# Altium PCB Red.PcbDoc (part 2 of 3)
Units mm, origin at the board's own origin, x right, y up, seen from the top; angles counter-clockwise.
Board outline 152.4 x 101.6 mm, 4 copper layers (Top Layer, VCC, GND, Bottom Layer); 97 components, 56 nets, 284 pads, 185 vias.
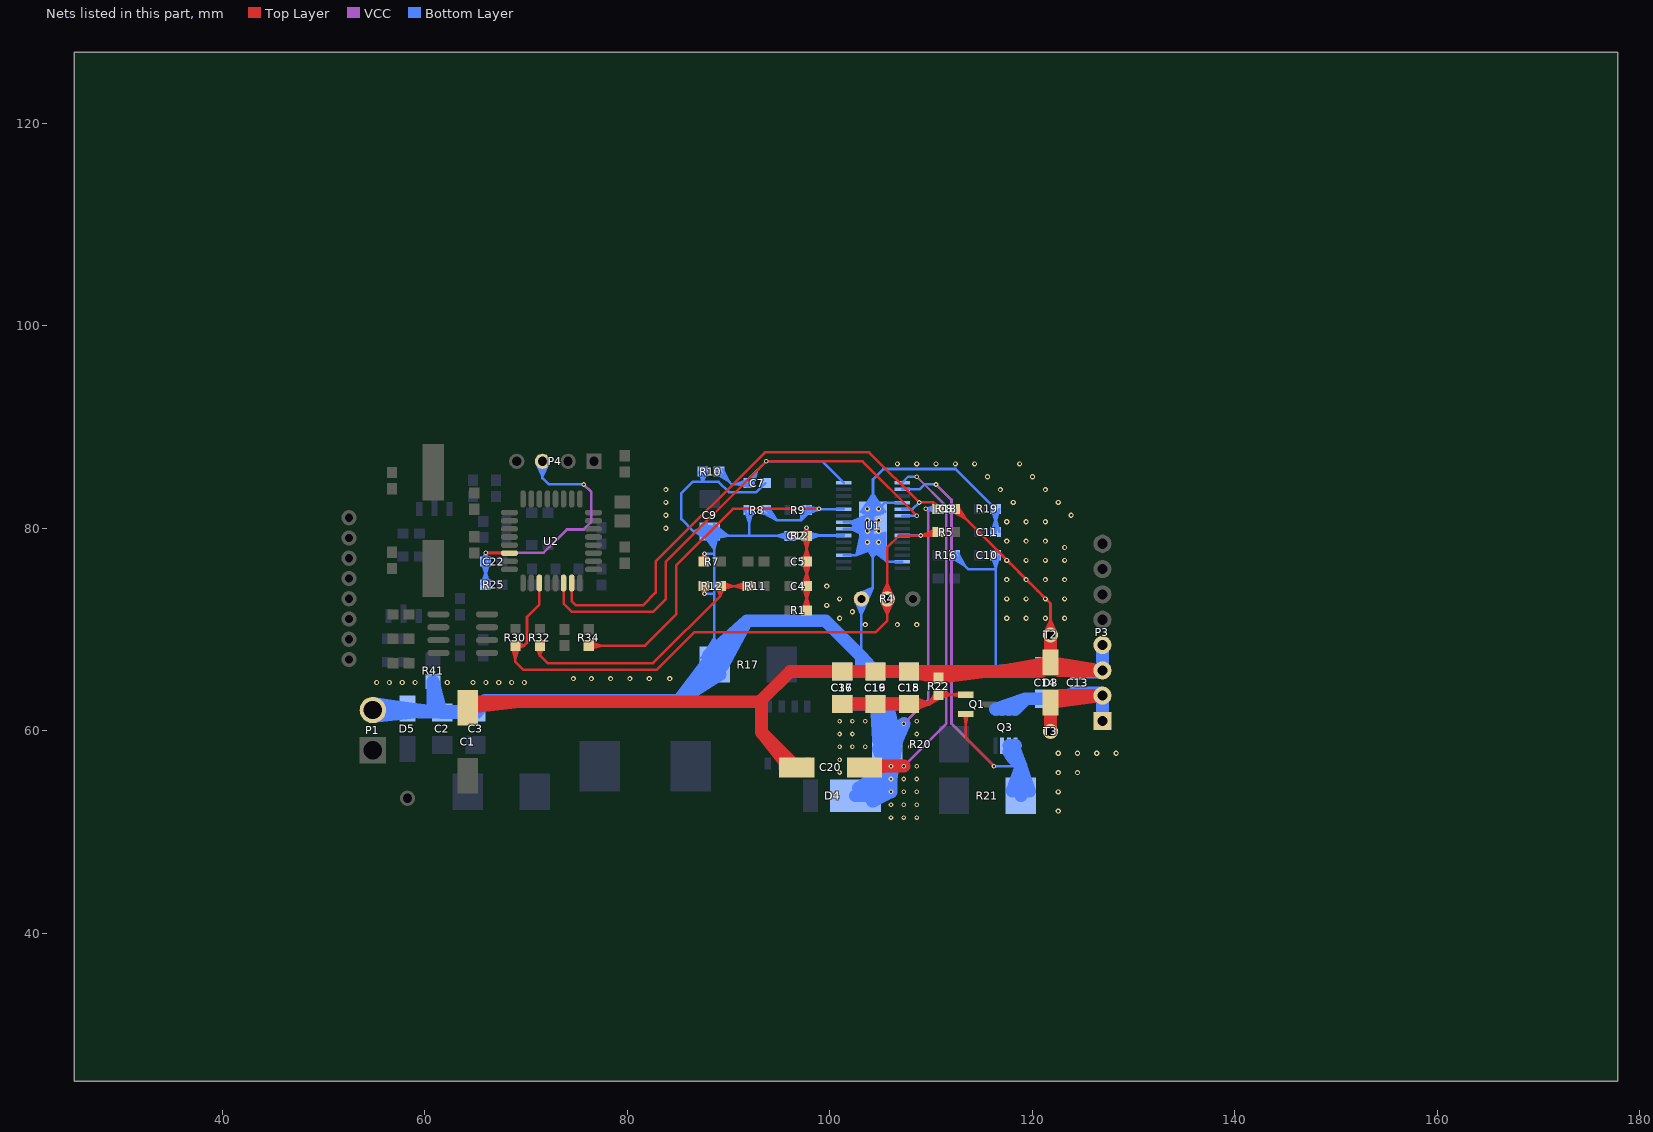
[diagram p4: the nets of this part, all layers, seen from the top]

## Via types
v1: diameter 0.457, hole 0.229, Top Layer to Bottom Layer, tented both sides, 92 vias
v2: diameter 0.508, hole 0.254, Top Layer to Bottom Layer, tented both sides, 85 vias
v3: diameter 0.508, hole 0.254, Top Layer to Bottom Layer, 8 vias

## Nets (pads, with @x,y where several pads share a name; then routed paths per layer and width w, separated by ;. In a path a pad name is that pad's centre, name@x,y a point inside that pad or via, vN(x,y) a via of type N, cw(c..) or ccw(c..) an arc to the next point about the centre after c; other vN are vias at no path point) (continued)
CSOUT: C7.2 R10.2 U1.6 U1.28 U2.14 | length 82.7
  Top Layer w0.254: U2.14@73.717,74.59 73.717,72.587 74.549,71.755 82.55,71.755 83.82,73.025 83.82,76.708 v1(93.726,86.614) ; 92.959,85.847 v1(93.726,86.614) ; 107.838,82.027 v1(108.585,81.239) 108.585,81.28 103.251,86.614 v1(93.726,86.614)
  Bottom Layer w0.254: R10.2@88.881,85.308 90.104,84.559 ; R10.2@89.065,85.598 90.318,84.345 92.037,84.345 92.037,84.925 v1(93.726,86.614) 99.267,86.614 U1.28@101.392,84.489 100.678,85.203 ; R10.2@89.115,85.598 90.104,84.559 ; R10.2@89.416,85.818 90.104,84.559 ; C7.2@91.793,84.684 92.853,85.741 ; C7.2@91.9,84.818 90.72,84.345 ; C7.2@91.965,84.083 90.72,84.345 ; C7.2@91.987,84.455 90.72,84.345 ; C7.2@92.087,84.455 92.853,85.741 ; C7.2@92.429,84.306 92.853,85.741 ; U1.6@107.142,81.239 v1(108.585,81.239) ; U1.6@107.594,81.239 v1(108.585,81.239) ; v1(108.585,81.239) 107.742,81.239 v1(108.585,81.239)
CTRL: R4.2 R5.2 R30.2 U1.9 U2.11 | length 95
  Top Layer w0.254: R30.2@68.592,68.31 68.961,67.103 ; R30.2@68.961,68.365 68.961,67.103 ; R30.2@69.043,68.051 69.812,68.415 ; R30.2@69.043,68.779 69.812,68.415 ; R30.2@69.33,68.31 68.961,67.103 ; U2.11@71.317,74.59 71.317,72.46 70.104,71.247 70.104,68.707 69.812,68.415 ; R4.2@105.043,72.893 105.664,71.501 ; R4.2@105.043,73.157 105.664,74.549 ; R4.2@105.286,72.977 105.664,71.501 ; R4.2@105.286,73.073 105.664,74.549 ; R4.2@106.042,72.977 105.664,71.501 ; R4.2@106.042,73.073 105.664,74.549 ; R4.2@106.285,72.893 105.664,71.501 ; R4.2@106.285,73.157 105.664,74.549 ; 107.972,79.248 v1(108.966,79.289) ; 109.959,79.248 v1(108.966,79.289) ; 109.961,79.669 v1(108.966,79.289) ; 109.996,79.457 v1(108.966,79.289) ; R5.2@110.518,79.976 109.195,79.248 ; R5.2@110.656,79.629 109.195,79.248 ; R5.2@110.706,79.629 110.325,79.248 106.807,79.248 105.664,78.105 R4.2@105.664,73.025 105.664,70.866 104.521,69.723 86.614,69.723 82.931,66.04 69.723,66.04 68.961,66.802 R30.2@68.961,68.415 69.812,68.415 ; v1(108.966,79.289) 109.195,79.248 ; v1(108.966,79.289) 109.195,79.248 ; v1(108.966,79.289) 109.195,79.248 ; v1(108.966,79.289) 110.705,79.259 109.195,79.248
  Bottom Layer w0.254: U1.9@107.142,79.289 v1(108.966,79.289) ; U1.9@107.742,79.289 108.679,79.289 v1(108.966,79.289) ; v1(108.966,79.289) 107.975,79.289 v1(108.966,79.289)
EN/UVLO: R8.1 R9.1 R34.2 U1.24 | length 60.2
  Top Layer w0.254: R34.2@76.2,68.415 81.75,68.415 84.836,71.501 84.836,76.327 90.424,81.915 v1(98.933,81.915) ; R34.2@76.255,68.046 77.462,68.415 R34.2@76.255,68.784
  Bottom Layer w0.254: R8.1@93.47,81.485 94.76,80.792 ; R8.1@93.637,81.915 94.78,80.772 97.155,80.772 ; R8.1@93.687,81.788 94.76,80.792 ; R8.1@93.974,82.027 94.76,80.792 ; R9.1@97.293,81.894 97.155,80.772 ; R9.1@97.651,81.788 97.155,80.772 ; R9.1@97.701,81.915 R9.1@97.701,81.788 97.701,81.318 97.155,80.772 ; R9.1@97.727,81.889 U1.24@101.392,81.889 ; R9.1@97.751,81.788 v1@99.02,81.889 ; R9.1@97.776,82.16 v1@99.02,81.889 ; R9.1@97.835,81.425 v1@99.02,81.889 ; R9.1@97.941,81.889 v1(98.933,81.915) ; R9.1@97.946,81.804 v1(98.933,81.915) ; R9.1@97.955,81.571 97.155,80.772 ; R9.1@97.959,82.12 v1(98.933,81.915) ; R9.1@98.008,81.493 v1(98.933,81.915) ; 99.855,81.889 U1.24@100.792,81.889 ; 99.925,81.889 v1(98.933,81.915)
F\A\U\L\T\: R11.1 R12.2 R32.2 | length 37.7
  Top Layer w0.254: R32.2@71.009,68.29 71.374,67.437 ; R32.2@71.374,68.288 71.374,67.437 ; R32.2@71.374,68.365 71.374,67.437 ; R32.2@71.739,68.29 71.374,67.437 ; R12.2@88.826,74.224 89.192,73.317 ; R12.2@89.242,74.295 90.504,74.295 ; R12.2@89.297,73.926 90.504,74.295 ; R12.2@89.297,74.664 90.504,74.295 ; R12.2@89.558,74.224 89.192,73.317 ; R11.1@91.805,73.926 90.598,74.295 ; R11.1@91.805,74.664 90.598,74.295 ; R11.1@91.86,74.295 90.598,74.295 ; R11.1@91.91,74.295 R12.2@89.192,74.295 89.192,73.317 ; 71.374,67.437 72.136,66.675 82.55,66.675 89.192,73.317
GND: C1.2 C2.1 C3.1 C7.1 C8.1 C9.1 C10.2 C11.2 C12.2 C13.1 C14.1 C15.1 C16.1 C17.1 C18.1 C19.1 C20.2 C36.1 D3.1 D5.1 P1.2 P3.3 P3.4 R4.1 R7.1 R8.2 R10.1 R12.1 R16.2 R17.1 R19.2 R22.1 R41.2 T2.1 U1.4 U1.13 U1.17 U1.21 U1.22 U1.29 | length 936
  Top Layer w0.254: C8.1@112.14,81.611 113.415,80.933 ; C8.1@112.306,82.042 121.793,72.555 ; C8.1@112.356,81.915 113.415,80.933 ; C8.1@112.643,82.153 113.415,80.933 ; 116.701,77.647 v2(117.475,76.835) 118.286,76.062 ; 118.606,75.742 v2(119.38,74.93) 120.19,74.158 ; 120.511,73.837 v2(121.285,73.025) 121.793,72.555 ; T2.1@121.183,69.597 121.793,70.981 ; T2.1@121.427,69.514 121.793,70.981 ; T2.1@121.793,69.469 121.793,72.555 ; T2.1@122.159,69.514 121.793,70.981 ; T2.1@122.403,69.597 121.793,70.981 ; v1@87.592,73.571 R12.1@87.592,74.295 ; v1@87.592,73.571 87.232,74.199 v1(87.63,73.533) ; v1@87.592,73.571 87.952,74.199 v1(87.63,73.533) ; v1@87.592,73.571 R12.1@87.592,74.295 ; R12.1@87.592,74.295 v1(87.63,73.533) ; R12.1@87.592,74.295 v1(87.63,73.533) ; v1@87.592,77.432 87.952,76.804 v1(87.63,77.47) ; v1@87.592,77.432 87.232,76.804 v1(87.63,77.47) ; v1@87.592,77.432 R7.1@87.592,76.708 v1(87.63,77.47) ; v1@87.592,77.432 v1(87.63,77.47)
  Top Layer w1.27: 69.36,62.865 C1.2@64.262,62.278 64.849,62.865 93.266,62.865 ; C20.2@95.976,56.388 93.266,59.848 ; 96.409,65.862 C36.1@101.119,65.862 ; C20.2@96.726,56.388 93.266,59.848 ; 115.366,65.862 R22.1@110.744,65.239 ; 116.827,65.862 D3.1@121.793,66.77 ; D3.1@121.793,67.27 T2.1@121.793,69.469 D3.1@121.793,66.77 ; P3.3@126.632,65.973 D3.1@121.793,66.77 ; P3.3@126.921,65.973 122.59,65.973 D3.1@121.793,66.27 ; 93.266,59.848 93.266,63.04 96.088,65.862 C36.1@101.219,65.862 ; C36.1@101.219,65.862 104.421,65.862 101.319,65.862 C19.1@104.521,65.862 ; C36.1@101.219,65.862 C19.1@104.521,65.862 ; C19.1@104.521,65.862 107.723,65.862 104.621,65.862 C18.1@107.823,65.862 ; C19.1@104.521,65.862 C18.1@107.823,65.862 ; C18.1@107.823,65.862 R22.1@110.744,65.239 ; C18.1@107.823,65.862 120.885,65.862 ; R22.1@110.744,65.239 107.923,65.862 112.633,65.862 R22.1@110.744,65.239 ; 120.885,65.862 D3.1@121.793,66.27 ; 120.885,65.862 D3.1@121.793,66.27 ; 120.885,65.862 D3.1@121.793,66.77
  Bottom Layer w0.254: R10.1@87.099,85.527 87.465,84.62 ; R17.1@87.326,67.219 88.57,69.113 ; R10.1@87.465,85.598 87.465,84.62 ; C9.1@87.529,79.371 88.57,77.953 ; R17.1@87.555,67.087 88.57,69.113 ; v1(87.63,73.533) 88.57,73.533 ; v1(87.63,77.47) 88.57,77.47 ; C9.1@87.748,79.508 88.57,77.953 ; R17.1@87.794,66.984 88.57,69.113 ; R10.1@87.831,85.527 87.465,84.62 ; C9.1@87.835,78.934 86.563,79.68 ; C9.1@87.835,80.426 86.563,79.68 ; C9.1@87.947,79.169 86.563,79.68 ; C9.1@87.947,80.191 86.563,79.68 ; C9.1@87.982,79.611 88.57,77.953 ; C9.1@88.014,79.416 86.563,79.68 ; C9.1@88.014,79.944 86.563,79.68 ; C9.1@88.038,79.68 86.563,79.68 ; R17.1@88.04,66.909 88.57,69.113 ; C9.1@88.138,79.68 86.563,79.68 ; C9.1@88.188,79.163 90.014,79.248 ; C9.1@88.194,79.419 90.014,79.248 ; C9.1@88.218,78.907 90.014,79.248 ; R17.1@88.291,66.864 88.57,69.113 ; C9.1@88.319,79.932 90.014,79.248 ; C9.1@88.431,80.162 90.014,79.248 ; C9.1@88.501,79.71 88.57,77.953 ; R17.1@88.57,67.771 88.57,73.533 ; C9.1@88.575,80.375 90.014,79.248 ; R17.1@88.648,66.848 88.57,69.113 ; C9.1@88.757,79.702 88.57,77.953 ; R17.1@89.003,66.888 88.57,69.113 ; C9.1@89.011,79.656 88.57,77.953 ; R17.1@89.25,66.951 88.57,69.113 ; R17.1@89.491,67.042 88.57,69.113 ; R17.1@89.722,67.161 88.57,69.113 ; R17.1@89.941,67.309 88.57,69.113 ; R8.2@91.668,81.733 92.037,80.526 R8.2@92.406,81.733 ; 92.037,79.413 R8.2@92.037,81.788 ; C7.1@93.637,84.455 92.748,83.566 90.043,83.566 89.027,84.582 86.449,84.582 85.344,83.477 85.344,80.899 86.563,79.68 ; C12.2@95.996,78.879 94.789,79.248 ; C12.2@95.996,79.617 94.789,79.248 ; C12.2@96.051,79.248 94.789,79.248 ; C12.2@96.101,79.248 88.57,79.248 88.57,77.47 ; U1.17@101.392,77.339 102.612,77.339 ; U1.21@101.392,79.939 103.942,79.939 U1.29@104.267,80.264 ; U1.22@101.392,80.589 U1.29@103.942,80.589 ; U1.17@101.992,77.339 102.612,77.339 ; U1.21@101.992,79.939 U1.29@102.929,79.939 ; U1.22@101.992,80.589 U1.29@102.929,80.589 ; 102.242,79.875 v3(103.717,79.714) ; 102.242,80.653 v3(103.717,80.814) ; 102.296,79.883 v3(103.717,79.714) ; 102.296,80.645 v3(103.717,80.814) ; R4.1@102.503,72.893 103.124,71.501 ; 102.657,79.824 v3(103.717,79.714) ; 102.657,80.704 v3(103.717,80.814) ; 102.661,79.939 v3(103.717,79.714) ; 102.661,80.589 v3(103.717,80.814) ; 102.67,79.833 v3(103.717,79.714) ; 102.67,80.695 v3(103.717,80.814) ; 102.68,80.16 v3(103.717,79.714) ; 102.68,80.368 v3(103.717,80.814) ; 102.697,80.186 v3(103.717,79.714) ; 102.697,80.342 v3(103.717,80.814) ; 102.705,79.893 v3(103.717,79.714) ; 102.705,79.897 v3(103.717,79.714) ; 102.705,80.631 v3(103.717,80.814) ; 102.705,80.635 v3(103.717,80.814) ; R4.1@102.746,72.977 103.124,71.501 ; R4.1@102.776,73.556 104.226,74.127 ; 102.786,80.221 v3(103.717,80.814) ; 102.786,80.307 v3(103.717,79.714) ; 102.79,80.203 v3(103.717,79.714) ; 102.79,80.325 v3(103.717,80.814) ; 102.793,80.201 v3(103.717,80.814) ; 102.793,80.327 v3(103.717,79.714) ; 102.798,80.227 v3(103.717,79.714) ; 102.798,80.301 v3(103.717,80.814) ; 102.863,77.775 v3(103.717,78.614) ; R4.1@102.89,73.325 104.226,74.127 ; 102.94,77.797 v3(103.717,78.614) ; 102.997,77.785 v3(103.717,78.614) ; 102.999,77.645 v3(103.717,78.614) ; 103.012,77.739 v3(103.717,78.614) ; 103.017,77.732 v3(103.717,78.614) ; U1.29@103.085,78.773 v3(103.717,79.714) ; 103.124,65.862 103.124,66.04 ; 103.124,67.31 R4.1@103.124,73.025 104.226,74.127 ; U1.29@103.155,79.815 102.612,77.339 ; U1.29@103.254,78.776 v3(103.717,79.714) ; R4.1@103.424,72.791 104.226,74.127 ; U1.29@103.479,78.661 105.457,76.874 ; R4.1@103.502,72.977 103.124,71.501 ; U1.29@103.621,78.138 v3(104.817,78.614) ; U1.29@103.647,79.653 102.612,77.339 ; R4.1@103.655,72.677 104.226,74.127 ; U1.29@103.661,78.843 105.457,76.874 ; U1.29@103.737,79.14 U1.22@102.121,80.589 ; U1.29@103.737,81.388 U1.21@102.121,79.939 ; R4.1@103.745,72.893 103.124,71.501 ; U1.29@103.756,79.131 U1.22@102.034,80.589 ; U1.29@103.756,81.397 U1.21@102.034,79.939 ; U1.29@103.853,78.132 v3(104.817,78.614) ; U1.29@103.916,77.996 v3(104.817,78.614) ; 104.028,77.537 v3(103.717,78.614) ; U1.29@104.04,81.281 104.267,83.401 ; 104.052,77.639 v3(103.717,78.614) ; 104.051,82.974 v3(103.717,81.914) ; 104.079,82.881 v3(103.717,81.914) ; 104.081,77.351 v3(103.717,78.614) ; U1.29@104.093,79.033 U1.21@102.121,79.939 ; U1.29@104.093,81.495 U1.22@102.121,80.589 ; U1.29@104.1,79.032 U1.21@102.034,79.939 ; U1.29@104.1,81.496 U1.22@102.034,80.589 ; 104.101,83.153 v3(103.717,81.914) ; 104.12,77.63 v3(103.717,78.614) ; 104.15,82.893 v3(103.717,81.914) ; 104.184,77.608 v3(103.717,78.614) ; U1.29@104.221,80.042 U1.22@102.121,80.589 ; U1.29@104.221,80.486 U1.21@102.121,79.939 ; U1.29@104.223,80.041 U1.22@102.034,80.589 ; U1.29@104.223,80.487 U1.21@102.034,79.939 ; U1.29@104.267,81.269 104.267,83.401 ; 104.355,77.641 v3(104.817,78.614) ; 104.384,82.893 v3(104.817,81.914) ; 104.415,77.395 v3(104.817,78.614) ; 104.428,77.654 v3(104.817,78.614) ; 104.433,83.153 v3(104.817,81.914) ; 104.455,82.881 v3(104.817,81.914) ; 104.46,77.568 v3(104.817,78.614) ; 104.472,77.764 v3(103.717,78.614) ; 104.474,77.602 v3(103.717,78.614) ; 104.483,82.974 v3(104.817,81.914) ; U1.29@104.493,79.243 104.226,77.126 ; U1.29@104.494,81.281 104.267,83.401 ; 104.561,77.856 v3(103.717,78.614) ; 104.719,77.858 v3(103.717,78.614) ; U1.29@104.748,78.703 102.612,77.339 ; U1.29@104.825,79.656 v3(104.817,78.614) ; U1.29@104.876,78.48 102.612,77.339 ; U1.29@104.981,78.241 102.612,77.339 ; U1.29@104.982,78.511 v3(104.817,79.714) ; 105.136,77.516 v3(104.817,78.614) ; 105.156,77.634 v3(104.817,78.614) ; 105.169,77.346 v3(104.817,78.614) ; U1.29@105.219,79.529 105.457,76.874 ; 105.233,77.647 v3(104.817,78.614) ; 105.315,77.628 v3(104.817,78.614) ; U1.29@105.478,79.539 105.457,76.874 ; U1.29@105.605,82.539 U1.4@106.542,82.539 ; U1.13@106.542,76.689 105.642,76.689 ; U1.13@107.142,76.689 105.642,76.689 ; U1.4@107.142,82.539 105.442,82.539 v3(104.817,81.914) ; R16.2@112.122,77.053 113.345,76.304 ; R16.2@112.306,77.343 113.703,75.946 116.37,75.946 ; R16.2@112.356,77.343 113.345,76.304 ; R16.2@112.657,77.563 113.345,76.304 ; C10.2@116.001,77.288 116.37,76.081 C10.2@116.739,77.288 ; C11.2@116.001,79.684 116.37,80.891 C11.2@116.739,79.684 ; R19.2@116.001,81.86 116.37,80.653 R19.2@116.739,81.86 ; 116.37,65.946 116.37,75.946 ; C10.2@116.37,77.343 116.37,75.946 ; C11.2@116.37,79.629 R19.2@116.37,81.915 112.433,85.852 105.283,85.852 104.267,84.836 U1.29@104.267,80.264 ; 88.57,73.533 88.57,77.47 ; 88.57,77.953 88.238,79.68 90.014,79.248 ; U1.21@102.034,79.939 v3(103.717,79.714) ; U1.21@102.034,79.939 U1.29@104.267,80.264 ; U1.21@102.034,79.939 U1.29@104.288,80.038 ; U1.21@102.034,79.939 104.147,80.73 v3(103.717,80.814) ; U1.21@102.034,79.939 104.285,79.783 v3(103.717,79.714) ; U1.21@102.034,79.939 104.044,80.964 v3(103.717,80.814) ; U1.21@102.034,79.939 U1.29@104.253,79.529 ; U1.21@102.034,79.939 103.914,81.188 v3(103.717,80.814) ; U1.21@102.034,79.939 104.192,79.278 v3(103.717,79.714) ; U1.22@102.034,80.589 v3(103.717,80.814) ; U1.22@102.034,80.589 U1.29@104.267,80.264 ; U1.22@102.034,80.589 U1.29@104.288,80.49 ; U1.22@102.034,80.589 104.285,80.745 v3(103.717,80.814) ; U1.22@102.034,80.589 104.147,79.798 v3(103.717,79.714) ; U1.22@102.034,80.589 U1.29@104.253,80.999 ; U1.22@102.034,80.589 104.044,79.564 v3(103.717,79.714) ; U1.22@102.034,80.589 104.192,81.25 v3(103.717,80.814) ; U1.22@102.034,80.589 103.914,79.34 v3(103.717,79.714) ; U1.21@102.121,79.939 v3(103.717,79.714) ; U1.21@102.121,79.939 U1.29@104.267,80.264 ; U1.21@102.121,79.939 U1.29@104.289,80.038 ; U1.21@102.121,79.939 104.143,80.729 v3(103.717,80.814) ; U1.21@102.121,79.939 104.286,79.783 v3(103.717,79.714) ; U1.21@102.121,79.939 104.035,80.962 v3(103.717,80.814) ; U1.21@102.121,79.939 U1.29@104.252,79.529 ; U1.21@102.121,79.939 103.9,81.182 v3(103.717,80.814) ; U1.21@102.121,79.939 104.188,79.278 v3(103.717,79.714) ; U1.22@102.121,80.589 v3(103.717,80.814) ; U1.22@102.121,80.589 U1.29@104.267,80.264 ; U1.22@102.121,80.589 U1.29@104.289,80.49 ; U1.22@102.121,80.589 104.286,80.745 v3(103.717,80.814) ; U1.22@102.121,80.589 104.143,79.799 v3(103.717,79.714) ; U1.22@102.121,80.589 U1.29@104.252,80.999 ; U1.22@102.121,80.589 104.035,79.566 v3(103.717,79.714) ; U1.22@102.121,80.589 104.188,81.25 v3(103.717,80.814) ; U1.22@102.121,80.589 103.9,79.346 v3(103.717,79.714) ; 102.612,77.339 U1.29@104.267,79.259 ; 102.612,77.339 104.089,79.399 v3(103.717,78.614) ; 102.612,77.339 104.432,79.103 v3(103.717,78.614) ; 102.612,77.339 103.875,79.537 v3(103.717,78.614) ; 102.612,77.339 U1.29@104.6,78.912 ; 102.612,77.339 103.406,79.746 v3(103.717,79.714) ; 102.612,77.339 103.717,78.444 v3(103.717,78.614) ; v3(103.717,78.614) 103.352,78.628 v3(103.717,79.714) ; v3(103.717,78.614) v3(103.717,79.714) ; v3(103.717,78.614) U1.29@104.267,79.259 ; v3(103.717,78.614) U1.29@104.6,78.912 ; v3(103.717,78.614) 103.315,78.46 105.457,76.874 ; v3(103.717,78.614) 103.541,79.146 104.226,77.126 ; v3(103.717,78.614) 103.301,79.048 104.226,77.126 ; v3(103.717,78.614) 103.071,78.92 104.226,77.126 ; v3(103.717,78.614) 103.858,79.006 105.457,76.874 ; v3(103.717,78.614) 104.04,79.251 104.226,77.126 ; v3(103.717,78.614) 103.788,79.214 104.226,77.126 ; v3(103.717,79.714) U1.29@104.289,80.038 ; v3(103.717,79.714) U1.29@104.252,79.529 ; v3(103.717,79.714) U1.29@104.288,80.038 ; v3(103.717,79.714) U1.29@104.253,79.529 ; v3(103.717,79.714) U1.29@104.267,80.264 ; v3(103.717,80.814) U1.29@104.289,80.49 ; v3(103.717,80.814) U1.29@104.252,80.999 ; v3(103.717,80.814) U1.29@104.288,80.49 ; v3(103.717,80.814) U1.29@104.253,80.999 ; v3(103.717,81.914) 103.543,81.396 104.267,83.401 ; v3(103.717,81.914) 103.305,81.498 104.267,83.401 ; v3(103.717,81.914) 103.078,81.631 104.267,83.401 ; v3(103.717,81.914) 103.789,81.323 104.267,83.401 ; 104.226,74.127 104.226,78.105 105.642,76.689 ; 104.226,77.126 U1.29@104.267,79.259 ; 104.226,77.126 104.744,79.196 v3(104.817,78.614) ; 104.226,77.126 104.988,79.119 v3(104.817,78.614) ; 104.226,77.126 105.224,79.011 v3(104.817,78.614) ; 104.226,77.126 105.449,78.874 v3(104.817,78.614) ; U1.29@104.267,79.259 v3(104.817,78.614) ; U1.29@104.267,79.259 105.457,76.874 ; 104.267,83.401 104.745,81.323 v3(104.817,81.914) ; 104.267,83.401 104.991,81.396 v3(104.817,81.914) ; 104.267,83.401 105.229,81.498 v3(104.817,81.914) ; 104.267,83.401 105.456,81.631 v3(104.817,81.914) ; U1.29@104.6,78.912 v3(104.817,78.614) ; U1.29@104.715,79.434 v3(104.817,78.614) ; U1.29@104.715,79.434 v3(104.817,79.714) ; U1.29@104.715,79.434 105.457,76.874 ; v3(104.817,78.614) v3(104.817,79.714) ; v3(104.817,78.614) 105.122,78.651 v3(104.817,79.714) ; v3(104.817,78.614) 104.068,79.149 105.457,76.874 ; v3(104.817,78.614) 104.474,79.352 105.457,76.874 ; v3(104.817,78.614) 104.964,79.493 105.457,76.874
  Bottom Layer w1.27: R17.1@88.009,66.831 85.092,62.992 ; R17.1@88.017,67.44 91.821,70.866 ; C9.1@88.138,79.68 C9.1@88.57,79.248 ; R17.1@88.648,66.248 85.092,62.992 ; R17.1@88.648,66.848 91.821,70.866 ; R17.1@89.173,65.56 85.092,62.992 ; R17.1@89.37,66.371 91.821,70.866 ; C15.1@107.923,65.862 112.633,65.862 ; 116.286,65.862 C14.1@121.185,66.37 ; P3.4@126.921,68.473 P3.3@126.921,65.973 ; D5.1@58.293,62.198 54.906,61.387 59.993,61.924 ; D5.1@58.293,62.198 59.993,61.924 ; D5.1@58.293,62.198 54.939,62.713 59.993,61.924 ; D5.1@58.293,62.198 59.993,61.924 ; D5.1@58.293,62.198 56.906,61.924 C2.1@61.622,61.798 ; D5.1@58.293,62.198 C2.1@61.622,61.798 ; D5.1@58.293,62.198 P1.2@54.879,62.051 59.993,61.924 ; D5.1@58.293,62.198 59.993,61.924 ; D5.1@58.293,62.198 54.879,61.924 60.579,61.924 ; D5.1@58.293,62.198 60.579,61.924 ; 60.579,61.924 64.924,61.798 61.822,61.798 C3.1@64.898,61.924 ; 60.579,61.924 C2.1@61.622,61.798 ; 60.579,61.924 C2.1@61.622,61.798 ; 60.579,61.924 C2.1@61.622,61.798 ; 60.579,61.924 C3.1@64.898,61.924 ; 60.579,61.924 60.833,62.178 R41.2@60.833,64.863 C2.1@61.622,61.798 ; C3.1@64.898,61.924 65.966,62.992 ; 65.966,62.992 65.124,61.798 65.966,62.992 ; 65.966,62.992 85.092,62.992 ; 85.092,62.992 R17.1@88.648,66.548 88.648,67.693 91.821,70.866 ; 91.821,70.866 99.568,70.866 103.124,67.31 ; 103.124,65.862 C16.1@104.421,65.862 ; 103.124,65.862 C16.1@104.421,65.862 ; 103.124,65.862 C16.1@104.421,65.862 ; 103.124,65.862 101.319,65.862 C16.1@104.421,65.862 ; 103.124,65.862 C17.1@101.219,65.862 C16.1@104.421,65.862 ; 103.124,65.862 C16.1@104.521,65.862 ; 103.124,67.31 C16.1@104.421,65.862 ; 103.124,67.31 103.124,66.04 C16.1@104.421,65.862 ; C16.1@104.521,65.862 107.723,65.862 104.621,65.862 C15.1@107.823,65.862 ; C16.1@104.521,65.862 C15.1@107.823,65.862 ; C15.1@107.823,65.862 120.777,65.862 C14.1@121.285,66.37 ; C14.1@121.285,66.37 C13.1@124.46,65.82 ; C14.1@121.285,66.37 C13.1@123.91,66.37 ; C13.1@123.91,66.37 121.385,66.37 C13.1@124.46,65.82 ; C13.1@123.91,66.37 C13.1@124.46,65.82 ; C13.1@124.46,65.82 P3.3@126.921,65.973 ; C13.1@124.46,65.82 126.768,65.82 P3.3@126.921,65.973
  other v2: 122.555,52.07 122.555,53.975 122.555,55.88 124.46,55.88 122.555,57.785 124.46,57.785 126.365,57.785 128.27,57.785 55.245,64.77 56.515,64.77 57.785,64.77 59.055,64.77 62.23,64.77 64.77,64.77 66.04,64.77 67.31,64.77 68.58,64.77 69.85,64.77 74.676,65.151 76.454,65.151 78.359,65.151 80.264,65.151 82.169,65.151 84.201,65.151 103.505,70.485 106.68,70.485 108.585,70.485 100.965,71.12 117.475,71.12 119.38,71.12 121.285,71.12 123.19,71.12 102.235,71.755 99.695,72.39 100.965,73.025 117.475,73.025 119.38,73.025 123.19,73.025 99.695,74.295 117.475,74.93 121.285,74.93 123.19,74.93 119.38,76.835 121.285,76.835 123.19,76.835 123.19,78.105 117.475,78.74 119.38,78.74 121.285,78.74 83.82,80.01 117.475,80.645 119.38,80.645 121.285,80.645 83.82,81.28 123.825,81.28 83.82,82.55 118.11,82.55 122.555,82.55 83.82,83.82 116.84,83.82 121.285,83.82 115.57,85.09 120.015,85.09 106.68,86.36 108.585,86.36 110.49,86.36 112.395,86.36 114.3,86.36 118.745,86.36
  other v3: 104.817,80.814
INTVCC: C4.2 C5.1 C12.1 R1.1 R2.1 U1.20 | length 36.7
  Top Layer w0.254: R1.1@97.332,71.937 97.701,73.144 R1.1@98.07,71.937 ; C4.2@97.332,74.24 97.701,73.033 C4.2@98.07,74.24 ; C4.2@97.332,74.35 97.701,75.557 C4.2@98.07,74.35 ; C5.1@97.332,76.653 97.701,75.446 C5.1@98.07,76.653 ; C5.1@97.332,76.763 97.701,77.97 C5.1@98.07,76.763 ; R2.1@97.332,79.193 97.701,77.986 R2.1@98.07,79.193 ; R2.1@97.338,79.335 v1(97.701,80.048) ; R1.1@97.701,71.882 C4.2@97.701,74.295 C5.1@97.701,76.708 R2.1@97.701,79.248 v1(97.701,80.048) ; R2.1@98.064,79.335 v1(97.701,80.048)
  Bottom Layer w0.254: C12.1@97.338,79.335 v1(97.701,80.048) ; C12.1@97.751,79.248 99.016,79.289 ; C12.1@97.794,79.619 99.016,79.289 ; C12.1@97.818,78.881 99.016,79.289 ; C12.1@98.064,79.335 v1(97.701,80.048) ; 99.855,79.289 U1.20@100.792,79.289 ; U1.20@101.392,79.289 98.041,79.289 C12.1@97.701,79.629 ; C12.1@97.701,79.629 v1(97.701,80.048) ; C12.1@97.701,79.629 C12.1@97.701,79.248 v1(97.701,80.048)
IS_N: Q1.2 Q3.1 Q3.2 Q3.3 R21.1 U1.2 | length 72.3
  Top Layer w0.254: Q1.2@113.257,61.647 113.429,60.599 Q1.2@113.601,61.647 ; Q1.2@113.429,61.661 113.429,59.291 v1(116.205,56.515)
  VCC w0.254: v1(110.49,84.328) 112.014,82.804 112.014,60.706 v1(116.205,56.515)
  Bottom Layer w0.254: U1.2@107.142,83.839 108.858,83.839 109.347,84.328 v1(110.49,84.328) ; U1.2@107.742,83.839 108.679,83.839 ; v1(116.205,56.515) 118.87,56.515
  Bottom Layer w1.27: R21.1@118.017,54.037 118.87,56.515 ; R21.1@118.87,53.594 118.87,56.515 ; R21.1@118.87,53.894 118.87,56.515 ; R21.1@119.723,54.037 118.87,56.515 ; Q3.2@117.678,57.938 117.983,57.402 ; Q3.2@117.678,57.938 118.87,56.515 ; Q3.2@117.678,57.938 117.983,57.402 ; Q3.2@117.678,57.938 117.983,57.402 ; Q3.2@117.678,57.938 118.87,56.515 ; Q3.2@117.678,57.938 117.983,57.402 ; Q3.2@117.678,58.536 Q3.1@118.338,57.938 ; Q3.2@117.678,58.536 Q3.1@118.338,57.938 ; Q3.2@117.678,58.536 Q3.1@118.338,57.938 ; Q3.2@117.678,58.536 117.983,58.166 ; Q3.2@117.678,58.536 Q3.1@118.338,58.536 117.983,58.166 ; Q3.2@117.678,58.536 117.983,58.166 ; 117.983,57.402 Q3.1@118.338,57.938 ; 117.983,57.402 Q3.1@118.338,57.938 ; 117.983,57.402 118.87,56.515 ; 117.983,57.402 117.983,58.166 ; Q3.1@118.338,57.938 118.87,56.515
IS_P: C15.2 C16.2 C17.2 C18.2 C19.2 C20.1 C36.2 D4.2 Q1.1 R18.2 R20.2 R22.2 U1.1 | length 284.8
  Top Layer w0.254: R22.2@110.744,63.589 112.007,63.561 ; R22.2@110.772,63.561 Q1.1@113.429,63.561 ; R22.2@110.791,63.219 112.007,63.561 ; R22.2@110.807,63.957 112.007,63.561 ; Q1.1@112.94,63.389 111.892,63.561 ; Q1.1@112.94,63.733 111.892,63.561 ; Q1.1@112.954,63.561 111.892,63.561
  Top Layer w0.381: C18.2@107.823,62.662 109.817,62.662 ; C18.2@107.923,62.662 109.817,62.662 ; C18.2@107.951,62.335 109.817,62.662 ; C18.2@107.951,62.989 109.817,62.662 ; C18.2@108.056,61.965 109.817,62.662 ; C18.2@108.056,63.359 109.817,62.662 ; R22.2@110.506,63.736 109.817,62.662 ; R22.2@110.744,63.539 109.817,62.662 ; R22.2@110.744,63.589 109.817,62.662 ; R22.2@110.928,63.29 109.817,62.662
  Top Layer w1.27: C36.2@101.219,62.662 104.421,62.662 C36.2@101.319,62.662 ; C20.1@103.426,56.388 103.553,56.515 v1(106.045,56.515) ; C20.1@104.176,56.388 v1(106.045,56.515) ; v1(107.315,56.515) v1(106.045,56.515) ; C19.2@104.521,62.662 107.723,62.662 104.621,62.662 C18.2@107.823,62.662 C19.2@104.521,62.662
  VCC w0.254: v1(107.315,56.515) 111.506,60.706 111.506,82.169 v1(108.585,85.09) ; v1(107.315,60.706) 109.728,63.119 109.728,81.661 v1(109.474,81.915)
  Bottom Layer w0.254: v1(106.045,56.515) 107.036,56.515 ; v1@106.224,56.515 v1(107.315,56.515) ; U1.1@107.142,84.489 107.743,85.09 v1(108.585,85.09) ; R18.2@110.597,81.547 v1(109.474,81.915) ; R18.2@110.597,82.283 v1(109.474,81.915) ; R18.2@110.656,81.915 v1(109.474,81.915) ; R18.2@110.706,81.915 v1(109.474,81.915)
  Bottom Layer w1.27: C17.2@101.219,62.662 104.421,62.662 C17.2@101.319,62.662 ; D4.2@102.541,53.594 D4.2@103.303,53.594 ; C16.2@104.521,62.662 105.664,62.662 ; R20.2@105.158,59.674 v1(107.315,60.706) ; R20.2@106.39,58.501 v1(107.315,60.706) ; D4.2@102.845,54.353 v1(106.045,55.245) ; D4.2@102.845,54.353 v1(106.045,56.515) ; D4.2@102.845,54.353 105.666,55.957 ; D4.2@103.303,53.594 v1(106.045,55.245) ; D4.2@103.303,53.594 v1(106.045,56.515) ; D4.2@103.303,53.594 105.666,55.957 ; D4.2@103.441,53.594 v1(106.045,55.245) ; D4.2@103.441,53.594 v1(106.045,55.245) ; D4.2@103.441,53.594 v1(106.045,56.515) ; D4.2@103.441,53.594 105.666,55.957 ; D4.2@104.234,53.044 v1(106.045,53.975) ; D4.2@104.234,53.044 v1(106.045,53.975) ; D4.2@104.234,53.044 v1(106.045,55.245) ; D4.2@104.234,53.044 v1(106.045,55.245) ; D4.2@104.234,53.044 v1(106.045,56.515) ; D4.2@104.234,53.044 105.666,55.957 ; C16.2@104.621,62.662 105.664,62.662 ; C16.2@104.621,62.662 107.723,62.662 105.664,62.662 ; C16.2@104.621,62.662 105.666,62.66 ; C16.2@104.621,62.662 106.525,59.075 105.666,62.66 ; C16.2@104.621,62.662 105.664,62.662 ; C16.2@104.621,62.662 C15.2@107.823,62.662 105.664,62.662 ; C16.2@104.621,62.662 R20.2@105.666,58.974 ; C16.2@104.621,62.662 105.666,62.66 ; C16.2@104.621,62.662 104.807,59.075 105.666,62.66 ; C16.2@104.621,62.662 105.666,62.66 ; C16.2@104.621,62.662 105.664,62.662 ; C16.2@104.621,62.662 105.664,62.662 ; C16.2@104.621,62.662 105.666,62.66 ; C16.2@104.621,62.662 R20.2@105.666,59.057 ; C16.2@104.621,62.662 105.666,62.66 ; R20.2@104.815,58.219 v1(106.045,55.245) ; R20.2@104.815,58.219 v1(106.045,56.515) ; R20.2@104.815,58.219 105.666,55.957 ; 105.664,62.662 105.666,62.66 ; 105.666,55.957 v1(106.045,55.245) ; 105.666,55.957 v1(106.045,55.245) ; 105.666,55.957 v1(106.045,55.245) ; 105.666,55.957 v1(106.045,55.245) ; 105.666,55.957 v1(106.045,55.245) ; 105.666,55.957 v1(106.045,55.245) ; 105.666,55.957 v1(106.045,55.245) ; 105.666,55.957 v1(106.045,55.245) ; 105.666,55.957 v1(106.045,55.245) ; 105.666,55.957 v1(106.045,55.245) ; 105.666,55.957 v1(106.045,55.245) ; 105.666,55.957 v1(106.045,55.245) ; 105.666,55.957 v1(106.045,55.245) ; 105.666,55.957 v1(106.045,55.245) ; 105.666,55.957 v1(106.045,55.245) ; 105.666,55.957 v1(106.045,55.245) ; 105.666,55.957 v1(106.045,56.515) ; 105.666,55.957 v1(106.045,56.515) ; 105.666,55.957 v1(106.045,56.515) ; 105.666,55.957 v1(106.045,56.515) ; 105.666,55.957 v1(106.045,56.515) ; 105.666,55.957 R20.2@105.666,58.374 ; 105.666,55.957 R20.2@106.517,58.219 ; 105.666,55.957 R20.2@105.666,58.674 ; R20.2@105.666,58.374 v1(106.045,55.245) ; R20.2@105.666,58.374 v1(106.045,56.515) ; R20.2@105.666,58.674 v1(106.045,55.245) ; R20.2@105.666,58.674 v1(106.045,56.515) ; R20.2@105.666,58.674 R20.2@105.666,59.057 ; R20.2@105.666,58.974 v1(107.315,60.706) ; R20.2@105.666,58.974 105.666,62.66 ; R20.2@105.666,59.057 v1(107.315,60.706) ; R20.2@105.666,59.057 105.666,62.66 ; v1(106.045,53.975) v1(106.045,55.245) ; v1(106.045,55.245) R20.2@106.517,58.219 ; v1(106.045,55.245) v1(106.045,56.515) ; v1(106.045,55.245) v1(106.045,56.515) ; v1(106.045,55.245) v1(106.045,56.515) ; v1(106.045,56.515) R20.2@106.517,58.219
  other v1: 106.045,51.435 107.315,51.435 108.585,51.435 106.045,52.705 107.315,52.705 108.585,52.705 107.315,53.975 108.585,53.975 107.315,55.245 108.585,55.245 100.965,55.88 108.585,56.515 100.965,57.15 100.965,58.42 102.235,58.42 103.505,58.42 107.95,58.42 100.965,59.69 102.235,59.69 108.585,59.69 100.965,60.96 102.235,60.96 103.505,60.96 108.585,60.96
ISMON: C8.2 U1.5 U2.15 | length 55.2
  Top Layer w0.254: U2.15@74.517,74.59 74.517,72.803 74.93,72.39 81.534,72.39 82.804,73.66 82.804,76.708 93.599,87.503 103.886,87.503 v1(108.839,82.55) ; 108.072,83.317 v1(108.839,82.55) ; C8.2@110.31,81.775 110.198,82.55 ; C8.2@110.656,81.915 110.198,82.55 ; C8.2@110.706,82.042 110.198,82.55 ; C8.2@110.898,82.199 110.198,82.55 ; v1(108.839,82.55) 110.198,82.55
  Bottom Layer w0.254: U1.5@107.142,81.889 108.178,81.889 ; U1.5@107.742,81.889 108.178,81.889 ; 108.178,81.889 v1(108.839,82.55) 108.178,81.889
LD+: C13.2 C14.2 D3.2 P3.1 P3.2 Q3.5 Q3.6 Q3.7 Q3.8 T3.1 | length 67.2
  Top Layer w1.27: D3.2@121.793,62.27 T3.1@121.793,59.944 D3.2@121.793,62.77 P3.2@126.907,63.473 ; D3.2@122.496,63.473 P3.2@126.921,63.473
  Bottom Layer w1.27: C14.2@121.185,63.17 119.372,63.17 ; P3.1@126.921,60.973 P3.2@126.921,63.473 ; Q3.5@116.358,62.136 Q3.6@117.018,62.136 ; Q3.5@116.358,62.136 Q3.8@118.338,62.533 ; Q3.5@116.358,62.136 Q3.6@117.018,62.136 ; Q3.5@116.358,62.136 119.372,63.17 ; Q3.5@116.358,62.136 Q3.6@117.018,62.136 ; Q3.5@116.358,62.136 119.372,63.17 ; Q3.5@116.358,62.136 Q3.6@117.018,62.136 ; Q3.6@117.018,62.136 Q3.7@117.678,62.136 ; Q3.6@117.018,62.136 Q3.8@118.338,62.533 ; Q3.6@117.018,62.136 Q3.7@117.678,62.136 ; Q3.6@117.018,62.136 119.372,63.17 ; Q3.6@117.018,62.136 Q3.7@117.678,62.136 ; Q3.6@117.018,62.136 119.372,63.17 ; Q3.6@117.018,62.136 Q3.7@117.678,62.136 ; Q3.7@117.678,62.136 Q3.8@118.338,62.533 ; Q3.7@117.678,62.136 119.372,63.17 ; Q3.7@117.678,62.136 Q3.8@118.338,62.136 ; Q3.7@117.678,62.136 119.372,63.17 ; Q3.7@117.678,62.136 Q3.8@118.338,62.136 ; Q3.8@118.338,62.136 119.372,63.17 ; Q3.8@118.338,62.533 119.372,63.17 ; 119.372,63.17 C14.2@121.285,63.17 ; C14.2@121.285,63.17 C13.2@124.46,63.72 ; C14.2@121.285,63.17 C13.2@123.91,63.17 ; C13.2@123.91,63.17 121.385,63.17 C13.2@124.46,63.72 ; C13.2@123.91,63.17 C13.2@124.46,63.72 ; C13.2@124.46,63.72 P3.2@126.921,63.473 ; C13.2@124.46,63.72 126.674,63.72 P3.2@126.921,63.473
LP+: C22.2 P4.3 R25.2 U2.6 | length 44.5
  Top Layer w0.254: 67.038,77.54 v1(66.04,77.597) 66.097,77.54 U2.6@68.367,77.54
  VCC w0.254: v1(66.04,77.597) 71.755,77.597 74.041,79.883 75.692,79.883 76.454,80.645 76.454,83.566 v1(75.692,84.328)
  Bottom Layer w0.254: R25.2@65.635,74.488 66.04,75.685 ; C22.2@65.635,76.642 66.04,75.445 ; C22.2@65.641,76.802 v1(66.04,77.597) ; C22.2@66.37,76.771 v1(66.04,77.597) ; R25.2@66.372,74.466 66.04,75.685 ; C22.2@66.372,76.664 66.04,75.445 ; P4.3@71.018,86.486 71.628,85.102 ; P4.3@71.262,86.569 71.628,85.102 ; P4.3@71.628,86.614 71.628,84.963 72.263,84.328 v1(75.692,84.328) ; P4.3@71.994,86.569 71.628,85.102 ; P4.3@72.238,86.486 71.628,85.102 ; 66.04,75.445 C22.2@66.002,76.708 v1(66.04,77.597) ; 66.04,75.685 R25.2@66.002,74.422 66.04,74.46 v1(66.04,77.597)